# Altium PCB ThermoDisplay.PcbDoc
Units mm, origin at the board's own origin, x right, y up, seen from the top; angles counter-clockwise.
Board outline 60.95 x 36.71 mm, 2 copper layers (Top Layer, Bottom Layer); 35 components, 84 nets, 216 pads, 90 vias.
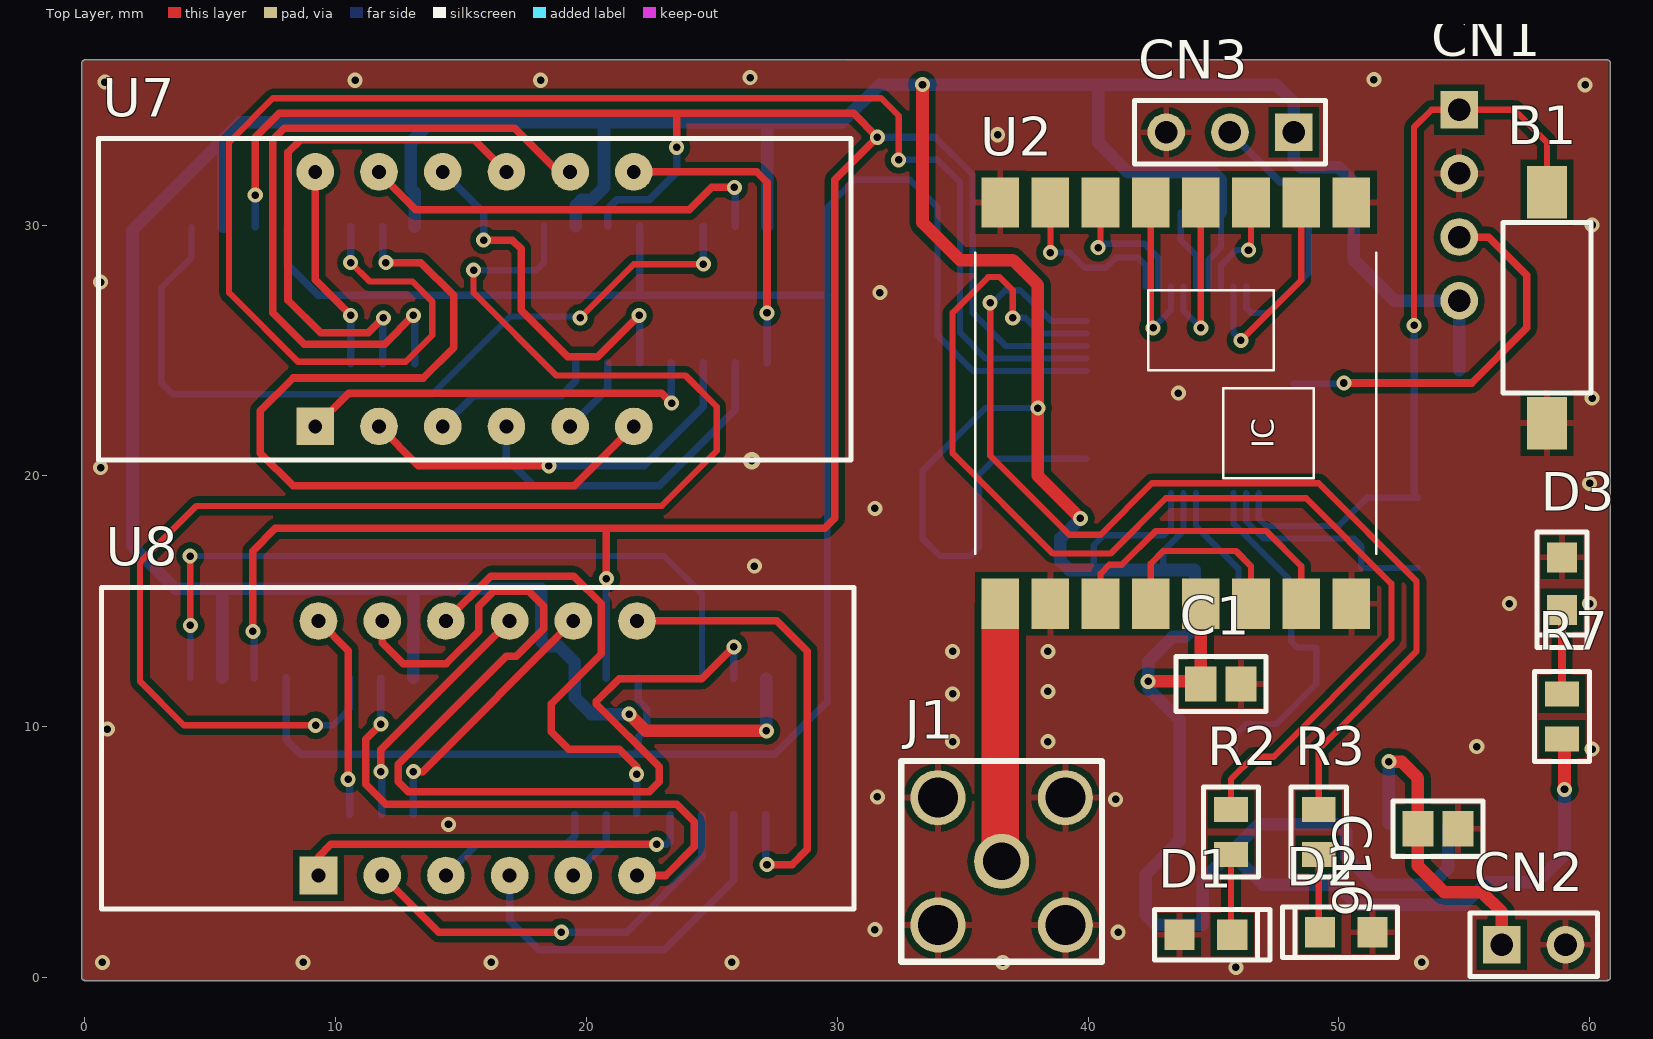
[diagram p0: Top Layer view]
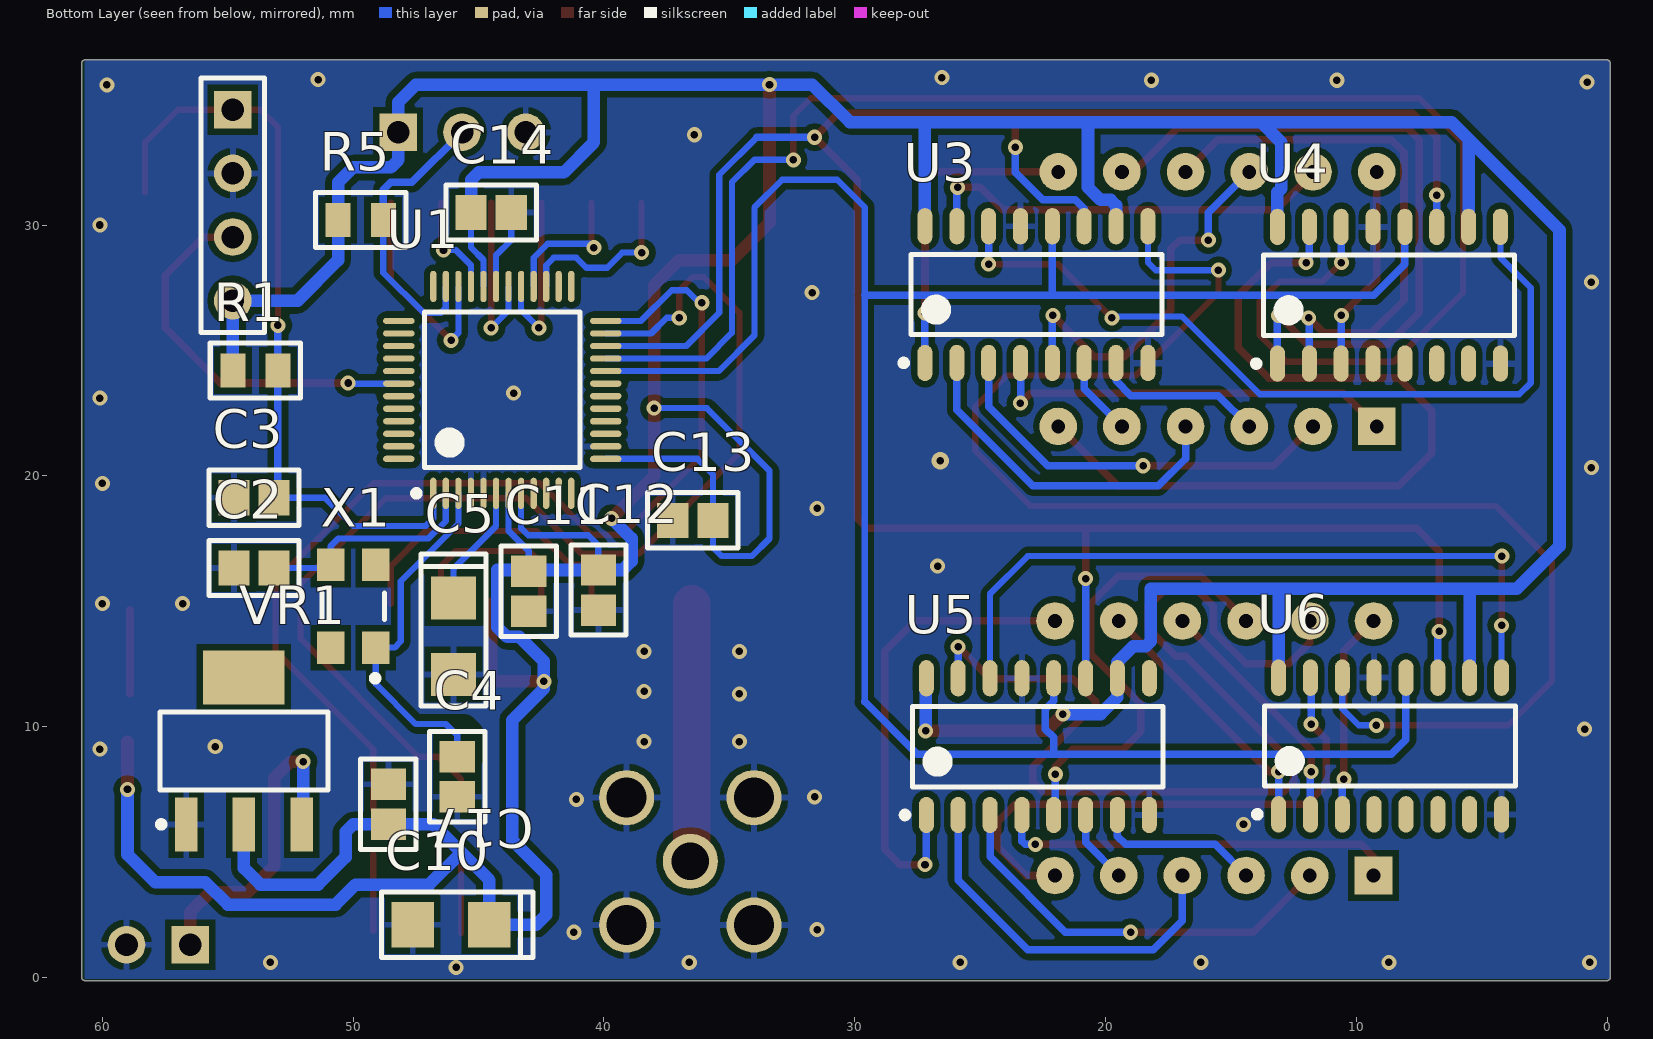
[diagram p1: Bottom Layer view, seen from below]

## Layer stack, top to bottom
Top Solder: solder mask 0.0102, Solder Resist, Dk 3.5
Top Layer: signal copper 0.0356
Dielectric 1: dielectric 0.32, FR-4, Dk 4.8
Bottom Layer: signal copper 0.0356
Bottom Solder: solder mask 0.0102, Solder Resist, Dk 3.5

## Board outline
-0.127,0 -0.127,36.38 cw(c0,36.38) -0.119,36.426 cw(c0.005,36.455) 0.005,36.582 60.7,36.582 cw(c60.7,36.455) 60.827,36.455 60.827,0 cw(c60.7,0) 60.7,-0.127 0,-0.127 cw(c0,0)

## Design rules (kind name [scope] priority, off if disabled: settings)
Clearance Clearance_GND_Polygons [All vs (InNamedPolygon('Top - GND polygon') OR InNamedPolygon('Bottom - GND polygon'))] p1: gap=0.25
Clearance [All] p2: gap=0.15
DiffPairsRouting [All] p1: maxlimit=1 minlimit=0.1 mostfreqgap=0.3 toplayer_minwidth=0.15 toplayer_maxwidth=0.381 toplayer_prefwidth=0.3 bottomlayer_minwidth=0.15 bottomlayer_maxwidth=0.381 bottomlayer_prefwidth=0.3 maxuncoupledlength=12.7
PolygonConnect PolygonConnect_GND_Vias [InNet('GND') AND IsVia] p1: connectstyle=Direct reliefconductorwidth=0.254 reliefentries=4 polygonreliefangle="90 Angle" airgapwidth=0.254
PolygonConnect [All] p2: connectstyle=Relief reliefconductorwidth=0.254 reliefentries=4 polygonreliefangle="90 Angle" airgapwidth=0.254
RoomDefinition ThermoDisplay [InComponentClass('ThermoDisplay')] p1: confinementstyle=ConfineOut formatcopy=TRUE lockcomponents=FALSE outline 131.704,-46.476 362.971,-46.476 362.971,-13.456 131.704,-13.456
RoutingVias [All] p1: holewidth=0.3 width=0.6 viastyle="Through Hole" minholewidth=0.3 minwidth=0.6 maxholewidth=0.3 maxwidth=0.6
SolderMaskExpansion [All] p1: expansion=0.102
Width [All] p1: maxlimit=1.5 minlimit=0.15 preferedwidth=0.3 bottomlayer_maxwidth=1 minimp=50.000000 maximp=50.000000 favimp=50.000000
28 further rules are at their usual default settings.

## Components (designator, comment, footprint, x,y, rotation, side; value= is the part's Value field where it differs from the comment)
B1 "" FSMSM 58.3,22.1 r90 top
C1 "0.1uF" Cap0805 45.3,11.7 r180 top
C2 "12pF" Cap0805 53.956,16.325 r180 bottom
C3 "0.1uF" Cap0805 53.956,19.125 r180 bottom
C4 "12pF" Cap0805 45.85,8 r90 bottom
C5 "1uF" TC_A 46,13.6 r270 bottom
C10 "1uF" TC_A 46.1,2.1 r0 bottom
C11 "0.1uF" Cap0805 43,15.4 r90 bottom
C12 "0.1uF" Cap0805 40.225,15.444 r90 bottom
C13 "0.1uF" Cap0805 36.456,18.225 r180 bottom
C14 "0.1uF" Cap0805 44.5,30.5 r0 bottom
C16 "0.1uF" Cap0805 53.956,5.925 r180 top
C17 "10uF" Cap0805 48.6,6.9 r270 bottom
CN1 "SWIM" "PLS-4 - bottom" 54.8,34.6 r0 top
CN2 "Name" PLS-2 56.5,1.3 r90 top
CN3 "Name" PLS-3 48.2,33.7 r270 top
D1 "Green" FYLS-0805 44.7,1.7 r180 top
D2 "Yellow" FYLS-0805 50.3,1.8 r0 top
D3 "Red" FYLS-0805 58.9,15.7 r90 top
J1 "SMA_RA" SMA_RA 36.556,4.625 r180 top
R1 "10K" Res0805 53.9,24.2 r0 bottom
R2 "510." Res0805 45.7,5.8 r90 top
R3 "510." Res0805 49.2,5.8 r90 top
R5 "4.7k" RES0805 49.7,30.2 r180 bottom
R7 "510." Res0805 58.9,10.4 r90 top
U1 "STM8S105C6T6" LQFP48_H 44.056,23.425 r90 bottom
U2 "RFM22B-S2" RFM22B-S2 43.5,22.9 r90 top
U3 "74HC595" SO-16_M 22.756,27.225 r90 bottom
U4 "74HC595" SO-16_M 8.7,27.2 r90 bottom
U5 "74HC595" SO-16_M 22.702,9.2 r90 bottom
U6 "74HC595" SO-16_M 8.656,9.225 r90 bottom
U7 "7seg4digLED" LD3361BS 9.19,21.969 r90 top
U8 "7seg4digLED" LD3361BS 9.317,4.062 r90 top
VR1 "LD1117" SOT223_M 54.356,9.025 r90 bottom
X1 "16MHz" KX-7 50,14.8 r90 bottom

## Footprints (in the part's own frame and the unit in brackets; to place one, negate y for a bottom-side part, rotate by r counter-clockwise, add the part's x,y. Pads: shape width x height; smd on the part's side, far side on the other; paste and mask are expansions set on the pad)
Cap0805 [mm]
  rect 1.25x1.4 smd: 1(-0.8,0) 2(0.8,0)
  silkscreen extent -1.8,-1.1 1.8,1.1
FSMSM [mm]
  rect 2.1x1.6 smd: 1(0,0) 2(9.2,0)
  silkscreen extent 1.2,-1.75 8,1.75, body extent -0.33,-1.77 9.63,1.73, height 4.4
FYLS-0805 [mm] "Diode"
  rect 1.2x1.2 smd: 1(-1.05,0) 2(1.05,0)
  silkscreen extent -2.55,-1 2.05,1
KX-7 [mm]
  rect 1.3x1.1 smd: 1(-1.65,-0.9) 2(1.65,0.9) 3(1.65,-0.9) 4(-1.65,0.9)
  silkscreen extent -3,-1.25 0.53,1.25
LD3361BS [mm] "segment four digit LED display 9.14mm"
  rect 1.5x1.5 hole 0.55: 1(0,0)
  round 1.5 hole 0.55: 2(0,-2.54) 3(0,-5.08) 4(0,-7.62) 5(0,-10.16) 6(0,-12.7) 7(10.15,-12.7) 8(10.15,-10.16) 9(10.15,-7.62) 10(10.15,-5.08) 11(10.15,-2.54) 12(10.15,0)
  silkscreen extent -1.34,-21.35 11.49,8.65
LQFP48_H [mm] "High dencity"
  oval 1.25x0.25 smd: 1(-4.125,2.75) 2(-4.125,2.25) 3(-4.125,1.75) 4(-4.125,1.25) 5(-4.125,0.75) 6(-4.125,0.25) 7(-4.125,-0.25) 8(-4.125,-0.75) 9(-4.125,-1.25) 10(-4.125,-1.75) 11(-4.125,-2.25) 12(-4.125,-2.75) 25(4.125,-2.75) 26(4.125,-2.25) 27(4.125,-1.75) 28(4.125,-1.25) 29(4.125,-0.75) 30(4.125,-0.25) 31(4.125,0.25) 32(4.125,0.75) 33(4.125,1.25) 34(4.125,1.75) 35(4.125,2.25) 36(4.125,2.75)
  oval 0.25x1.25 smd: 13(-2.75,-4.125) 14(-2.25,-4.125) 15(-1.75,-4.125) 16(-1.25,-4.125) 17(-0.75,-4.125) 18(-0.25,-4.125) 19(0.25,-4.125) 20(0.75,-4.125) 21(1.25,-4.125) 22(1.75,-4.125) 23(2.25,-4.125) 24(2.75,-4.125) 37(2.75,4.125) 38(2.25,4.125) 39(1.75,4.125) 40(1.25,4.125) 41(0.75,4.125) 42(0.25,4.125) 43(-0.25,4.125) 44(-0.75,4.125) 45(-1.25,4.125) 46(-1.75,4.125) 47(-2.25,4.125) 48(-2.75,4.125)
  silkscreen extent -4.25,-3.1 3.1,3.55, body extent -3.5,-3.5 3.5,3.5, height 1.6
PLS-2 [mm]
  rect 1.5x1.5 / inner rect 1.6x1.5 / far side rect 1.5x1.5 hole 0.9: 1(0,0)
  round 1.5 / inner oval 1.6x1.5 / far side round 1.5 hole 0.9: 2(0,-2.54)
  silkscreen extent -1.27,-3.81 1.27,1.27
PLS-3 [mm]
  rect 1.5x1.5 / inner rect 1.6x1.5 / far side rect 1.5x1.5 hole 0.9: 1(0,0)
  round 1.5 / inner oval 1.6x1.5 / far side round 1.5 hole 0.9: 2(0,-2.54) 3(0,-5.08)
  silkscreen extent -1.27,-6.35 1.27,1.27
"PLS-4 - bottom" [mm]
  rect 1.5x1.5 / inner rect 1.6x1.5 / far side rect 1.5x1.5 hole 0.9: 1(0,0)
  round 1.5 / inner oval 1.6x1.5 / far side round 1.5 hole 0.9: 2(0,-2.54) 3(0,-5.08) 4(0,-7.62)
Res0805 [mm]
  rect 1x1.35 smd: 1(-0.9,0) 2(0.9,0)
  silkscreen extent -1.8,-1.1 1.8,1.1
RES0805 [mm]
  rect 1x1.35 smd: 1(-0.9,0) 2(0.9,0)
  silkscreen extent -1.8,-1.1 1.8,1.1
RFM22B-S2 [mm]
  rect 2x1.5 smd: 1(-8,-1) 2(-8,5) 2(8,-7) 2(8,7) 3(-8,-3) 4(-8,-5) 5(-8,-7) 6(8,-5) 7(8,-3) 8(8,-1) 9(8,1) 10(8,3) 11(8,5) 12(-8,1) 13(-8,3) 14(-8,7)
  silkscreen extent -6,-8 6,8
SMA_RA [mm] "SMA RIGHT ANGEL PCB"
  round 2.2 hole 1.5: 1(0,0)
  round 2.2 hole 1.6: 2(-2.54,2.54) 2(-2.54,-2.54) 2(2.54,2.54) 2(2.54,-2.54)
  silkscreen extent -4,-4 4,4, body extent -3.12,-3.13 3.22,11.68, height 9.67
SO-16_M [mm] "SOP, 16-Leads, Body 9,90x3,90mm, Pitch 1,27mm, IPC Medium Density"
  oval 1.45x0.6 smd: 1(-2.725,4.445) 2(-2.725,3.175) 3(-2.725,1.905) 4(-2.725,0.635) 5(-2.725,-0.635) 6(-2.725,-1.905) 7(-2.725,-3.175) 8(-2.725,-4.445) 9(2.725,-4.445) 10(2.725,-3.175) 11(2.725,-1.905) 12(2.725,-0.635) 13(2.725,0.635) 14(2.725,1.905) 15(2.725,3.175) 16(2.725,4.445)
  silkscreen extent -2.85,-5 1.6,5.42, body extent -3.08,-5.04 3.08,5.04, height 2
SOT223_M [mm] "SOT223, 4-Leads, Body 6,50x7,00mm (avg), Pitch 2,30mm, IPC Medium Density"
  rect 2.15x0.9 smd: 1(-2.925,-2.3) 2(-2.925,2.3) 3(-2.925,0)
  rect 2.15x3.25 smd: 4(2.925,0)
  silkscreen extent -3.05,-3.35 1.55,3.43, body extent -1.85,-3.35 1.85,3.35, height 1.8
TC_A [mm]
  rect 1.7x1.8 smd: 1(-1.525,0) 2(1.525,0)
  silkscreen extent -3.27,-1.3 2.78,1.3

## Part data
B1: library part FSM14JRT, "Button"
C1 C3 C11 C12 C13 C14 C16: library part "Cap 0805 0.1uF", "Capacitor"
C2 C4: library part "Cap 0805 12pF", "Capacitor"
C5 C10: library part "TCap TC_A 1uF", "Capacitor polarity"
C17: library part "Cap 0805 10uF", "Capacitor"
CN1: "PLS-4"
CN2: library part PLS-2, "PLS-2"
CN3: library part PLS-3, "PLS-3"
D1: library part FYLS-0805UGC, "LED"
D2: library part FYLS-0805UYC, "LED"
D3: library part FYLS-0805URC, "LED"
J1: library part "SMA RIGHT ANGEL PCB"
R1: library part "Res 0805 10K", "Resistor"
R2 R3 R7: library part "Res 0805 510", "Resistor"
R5: library part Resistor, "Resistor"
U1: "Microcontroller"
U2: "Transmitter"
U3 U4 U5 U6: "Shift Register"
U7 U8: library part 7SEG4LED, "7 segment 4-digit LED"
VR1: "Voltage Regulator"
X1: library part "KX-7T 16.0 MHz", "XTAL"

## Via types
v1: diameter 0.6, hole 0.3, Top Layer to Bottom Layer, 88 vias
v2: diameter 0.6, hole 0.3, Top Layer to Bottom Layer, tented both sides, 1 vias
v3: diameter 0.7, hole 0.3, Top Layer to Bottom Layer, 1 vias

## Nets (pads, with @x,y where several pads share a name; then routed paths per layer and width w, separated by ;. In a path a pad name is that pad's centre, name@x,y a point inside that pad or via, vN(x,y) a via of type N, cw(c..) or ccw(c..) an arc to the next point about the centre after c; other vN are vias at no path point)
4LED1_P1: U3.4 U7.1 | length 16.5
  Top Layer w0.3: U7.1 10.521,23.3 23,23.3 v1(23.4,22.9)
  Bottom Layer w0.3: U3.4 23.391,22.909 v1(23.4,22.9)
4LED1_P2: U3.3 U7.2 | length 16.3
  Top Layer w0.3: U7.2 13.299,20.4 v1(18.5,20.4)
  Bottom Layer w0.3: v1(18.5,20.4) 22.3,20.4 24.661,22.761 U3.3
4LED1_P3: U3.7 U7.3 | length 6.8
  Bottom Layer w0.3: U7.3 15.501,23.2 19,23.2 19.581,23.781 U3.7
4LED1_P4: U3.2 U7.4 | length 14
  Bottom Layer w0.3: U7.4 16.81,20.69 17.9,19.6 22.9,19.6 25.931,22.631 U3.2
4LED1_P5: U3.6 U7.5 | length 3.2
  Bottom Layer w0.3: U7.5 20.851,23.47 U3.6
4LED1_P6: U4.15 U7.6 | length 33.5
  Top Layer w0.3: v1(12,28.5) 13.4,28.5 14.7,27.2 14.7,25.1 13.5,23.9 8.3,23.9 7,22.6 7,20.9 8.3,19.6 19.521,19.6 U7.6
  Bottom Layer w0.3: v1@11.875,28.575 U4.15
4LED1_P7: U3.1 U7.7 | length 12.7
  Top Layer w0.3: U7.7 26.781,32.119 27.2,31.7 v1(27.2,26.5)
  Bottom Layer w0.3: U3.1 v1@27.201,26.499
4LED1_P8: U4.1 U7.8 | length 28.1
  Top Layer w0.3: v1(13.1,26.4) 11.95,25.25 8.75,25.25 7.5,26.5 7.5,33.4 7.95,33.85 17.15,33.85 18.881,32.119 U7.8
  Bottom Layer w0.3: U4.1 v1@13.145,26.355
4LED1_P9: U4.2 U7.9 | length 21.7
  Top Layer w0.3: v1(11.9,26.3) 11.3,25.7 9.4,25.7 8.1,27 8.1,32.9 8.6,33.4 15.529,33.4 U7.9
  Bottom Layer w0.3: U4.2 v1@11.875,26.275
4LED1_P10: U3.5 U7.10 | length 15.5
  Top Layer w0.3: v1(15.9,29.4) 17.05,29.4 17.4,29.05 17.4,26.6 19.25,24.75 20.45,24.75 v1(22.1,26.4)
  Bottom Layer w0.3: U7.10 15.9,30.489 v1(15.9,29.4) ; U3.5 v1@22.121,26.379
4LED1_P11: U3.15 U7.11 | length 16.7
  Top Layer w0.3: U7.11 11.73,32.07 13.2,30.6 24.1,30.6 25,31.5 v1(25.9,31.5)
  Bottom Layer w0.3: U3.15 v1@25.931,31.469
4LED1_P12: U4.3 U7.12 | length 8.2
  Top Layer w0.3: U7.12 9.19,27.81 v1(10.6,26.4)
  Bottom Layer w0.3: U4.3 v1@10.605,26.395
4LED2_P1: U5.4 U8.1 | length 16.1
  Top Layer w0.3: U8.1 9.317,4.817 9.8,5.3 v1(22.8,5.3)
  Bottom Layer w0.3: v1(22.8,5.3) 23.2,5.3 23.337,5.437 U5.4
4LED2_P2: U5.3 U8.2 | length 16.6
  Top Layer w0.3: U8.2 14.119,1.8 v1(19,1.8)
  Bottom Layer w0.3: v1(19,1.8) 21.6,1.8 24.607,4.807 U5.3
4LED2_P3: U5.7 U8.3 | length 6.6
  Bottom Layer w0.3: U8.3 15.635,5.3 19.2,5.3 19.527,5.627 U5.7
4LED2_P4: U5.2 U8.4 | length 15
  Bottom Layer w0.3: U8.4 16.937,2.263 18.1,1.1 23.1,1.1 25.877,3.877 U5.2
4LED2_P5: U5.6 U8.5 | length 3
  Bottom Layer w0.3: U8.5 20.797,5.382 U5.6
4LED2_P6: U6.15 U8.6 | length 21.9
  Top Layer w0.3: v1(11.8,10.1) 11.2,9.5 11.2,7.7 12,6.9 23.6,6.9 24.3,6.2 24.3,5.2 23.162,4.062 U8.6
  Bottom Layer w0.3: v1(11.8,10.1) U6.15@11.8,11.919
4LED2_P7: U5.1 U8.7 | length 19
  Top Layer w0.3: U8.7 27.588,14.212 28.8,13 28.8,5.1 28.2,4.5 v1(27.2,4.5)
  Bottom Layer w0.3: v1@27.147,4.553 U5.1
4LED2_P8: U6.1 U8.8 | length 10.6
  Top Layer w0.3: v1(13.1,8.2) 13.465,8.2 U8.8
  Bottom Layer w0.3: U6.1 v1(13.1,8.2)
4LED2_P9: U6.2 U8.9 | length 9.8
  Top Layer w0.3: v1(11.8,8.2) 11.8,9.075 U8.9
  Bottom Layer w0.3: U6.2 v1@11.831,8.169
4LED2_P10: U5.5 U8.10 | length 19.3
  Top Layer w0.3: U8.10@14.397,14.297 U8.10 16.185,16 19.5,16 20.6,14.9 20.6,12.9 18.6,10.9 18.6,9.8 19.3,9.1 21.3,9.1 22,8.4 v1(22,8.1)
  Bottom Layer w0.3: U5.5@22,6.542 v1(22,8.1)
4LED2_P11: U5.15 U8.11 | length 41.9
  Top Layer w0.3: U8.11 11.857,13.343 12.7,12.5 14.4,12.5 15.7,13.8 15.7,14.8 16.3,15.4 17.7,15.4 18.3,14.8 18.3,13.9 17.2,12.8 16.8,12.8 12.5,8.5 12.5,7.8 12.9,7.4 22.5,7.4 22.9,7.8 22.9,8.4 20.4,10.9 20.4,11 21.3,11.9 24.6,11.9 v1(25.877,13.177)
  Bottom Layer w0.3: U5.15 v1(25.877,13.177)
4LED2_P12: U6.3 U8.12 | length 8.2
  Top Layer w0.3: U8.12 10.5,13.029 v1(10.5,7.9)
  Bottom Layer w0.3: v1(10.5,7.9) 10.561,7.839 U6.3
+3.3V: C1.2 C10.1 C11.2 C12.2 C13.2 C14.2 C17.2 CN1.4 CN3.1 R1.2 R5.1 R7.1 U1.7 U1.8 U1.13 U1.32 U2.1 U3.10 U3.16 U4.10 U4.16 U5.10 U5.16 U6.10 U6.16 VR1.3 | length 261.7
  Top Layer w0.5: v1(21.7,10.5) 22.373,9.827 v1(27.173,9.827) ; v1(33.4,35.6) 33.4,30.1 34.9,28.6 37,28.6 38,27.6 v1(38,22.7) 38,20 v1(39.7,18.3) ; v1(42.4,11.8) 44.5,11.8 U2.1 ; v1(59,7.5) R7.1@59,9.4
  Bottom Layer w0.25: v1(38,22.7) 35.9,22.7 33.4,20.2 33.4,17.5 34.1,16.8 35.3,16.8 35.656,17.156 C13.2 35.656,20.056 36.275,20.675 U1.13 ; C12.2 40.225,17.225 40.625,17.625 43.025,17.625 43.306,17.906 U1.8 ; C11.2 43,17 43.8,17.8 43.806,17.8 U1.7 ; U1.32 44.806,28.606 45.3,29.1 C14.2
  Bottom Layer w0.5: U6.10 5.481,15.481 ; U4.10 5.525,33.425 ; U6.16 13.101,15.499 ; U4.16 13.145,31.3 13,31.445 13,33.3 13.8,34.1 ; U3.10 19.581,30.781 19.8,31 20.2,31 20.7,31.5 20.7,34.1 ; v1(21.7,10.5) 20.2,10.5 19.527,11.173 U5.10 19.527,12.573 18.9,13.2 18.4,13.2 18.2,13.4 18.2,15.5 3.6,15.5 1.9,17.2 1.9,29.8 5.525,33.425 ; v1(27.173,9.827) U5.16@27.173,11.899 ; U3.16 27.201,34.099 ; v1(39.7,18.3) 38.9,17.5 38.9,16.6 39.256,16.244 C12.2 44.25,16.244 44.25,13.959 43.866,13.575 43.375,13.575 42.4,12.6 v1(42.4,11.8) 42.4,11.512 43.656,10.256 43.656,5.456 42.3,4.1 42.3,2.5 42.7,2.1 C10.1 44.575,3.875 45.688,4.987 ; C14.2 45.3,31.8 45,32.1 41.6,32.1 40.4,33.3 40.4,35.6 ; VR1.3 54.356,4.356 53.7,3.7 51.4,3.7 50.3,4.8 50.3,5.8 50,6.1 C17.2 46.8,6.1 45.688,4.987 ; R1.2 CN1.4 52.22,26.98 50.6,28.6 R5.1 50.6,31.7 50,32.3 48.5,32.3 48.2,32.6 CN3.1 48.2,34.9 47.5,35.6 40.4,35.6 ; v1(59,7.5) 59,4.9 57.9,3.8 55.9,3.8 55,2.9 50.7,2.9 49.9,3.7 46.975,3.7 45.688,4.987 ; 5.525,33.425 6.2,34.1 13.8,34.1 ; 13.8,34.1 20.7,34.1 ; 20.7,34.1 30.2,34.1 31.7,35.6 v1(33.4,35.6) 40.4,35.6
GND: B1.1 C1.1 C2.1 C3.1 C4.1 C5.2 C10.2 C11.1 C12.1 C13.1 C14.1 C16.1 C17.1 CN1.2 CN2.2 CN3.3 D1.2 D2.2 D3.2 J1.2 U1.4 U1.5 U1.14 U1.31 U2.2 U2.5 U3.8 U3.13 U4.8 U4.13 U5.8 U5.13 U6.8 U6.13 VR1.2 | length 3.2
  Bottom Layer w0.25: C14.1 43.7,29.4 44.306,28.794 U1.31
  other v1: 45.9,0.4 0.7,0.6 8.7,0.6 16.2,0.6 25.8,0.6 36.6,0.6 53.3,0.6 41.2,1.8 31.5,1.9 14.5,6.1 41.1,7.1 31.6,7.2 60.1,9.1 55.5,9.2 34.6,9.4 38.4,9.4 0.9,9.9 34.6,11.3 38.4,11.4 34.6,13 38.4,13 56.8,14.9 60,14.9 26.7,16.4 31.5,18.7 60,19.7 0.627,20.327 60.1,23.1 43.6,23.3 31.7,27.3 0.627,27.727 60.1,30 36.4,33.6 59.826,35.584 10.773,35.773 18.173,35.773 51.4,35.8 26.527,35.873
  other v2: 0.8,35.7
  other v3: 26.6,20.6
LED1: D1.1 R2.1 | length 3.2
  Top Layer w0.25: D1.1@45.7,1.75 R2.1
LED2: D2.1 R3.1 | length 3.1
  Top Layer w0.25: D2.1@49.2,1.85 R3.1
MAX10V: C16.2 CN2.1 VR1.1 | length 12.8
  Top Layer w0.5: v1(52,8.6) 52.5,8.6 53.156,7.944 C16.2 53.156,4.444 54.2,3.4 55.7,3.4 56.5,2.6 CN2.1
  Bottom Layer w0.5: VR1.1@52,6.156 v1(52,8.6)
NetB1_2: B1.2 C3.2 CN1.1 R1.1 U1.1 | length 30.7
  Top Layer w0.25: v1(53,26) 53,33.9 53.7,34.6 CN1.1 57,34.6 58.3,33.3 B1.2
  Bottom Layer w0.25: U1.1 46.806,18.294 47.1,18 50,18 51.125,19.125 C3.2
  Bottom Layer w0.3: C3.2@53,19.281 R1.1 v1(53,26)
NetC2_2: C2.2 U1.2 X1.2 | length 9.2
  Bottom Layer w0.25: U1.2 46.306,18.194 47,17.5 50.6,17.5 50.9,17.2 X1.2 50.9,16.325 C2.2
NetC4_2: C4.2 U1.3 X1.1 | length 14.4
  Bottom Layer w0.25: U1.3 45.806,18.094 48.1,15.8 48.1,13.4 48.35,13.15 X1.1 49.1,11.7 47.5,10.1 46.3,10.1 45.85,9.65 C4.2
NetC5_1: C5.1 U1.6 | length 4.9
  Bottom Layer w0.25: U1.6 44.306,17.994 46,16.3 C5.1
NetD3_1: D3.1 R7.2 | length 3.3
  Top Layer w0.3: R7.2 D3.1
NetJ1_1: J1.1 U2.14 | length 10.3
  Top Layer w1: J1.1@36.5,4.681 J1.1
  Top Layer w1.5: J1.1@36.5,4.681 U2.14
NETLABEL31: U4.4
NETLABEL32: U4.5
NETLABEL33: U4.6
NETLABEL34: U4.7
NETLABEL35: U6.4
NETLABEL36: U6.5
NETLABEL37: U6.6
NETLABEL38: U6.7
NetU2_3: U2.3 U2.12 | length 7.6
  Top Layer w0.25: U2.12 42.5,16.5 43,17 45.9,17 46.5,16.4 U2.3
NetU2_4: U2.4 U2.13 | length 12
  Top Layer w0.25: U2.13 40.5,16.1 40.85,16.45 41.35,16.45 42.7,17.8 47.1,17.8 48.5,16.4 U2.4
NetU3_9: U3.9 U6.14 | length 58.8
  Top Layer w0.25: v1(9.2,10.05) 3.95,10.05 2.2,11.8 2.2,16.55 4.45,18.8 23,18.8 25.2,21 25.2,22.75 23.95,24 18.8,24 15.5,27.3 v1(15.5,28.2)
  Bottom Layer w0.25: v1(9.2,10.05) 9.9,10.05 10.561,10.711 U6.14 ; v1(15.5,28.2) 18,28.2 18.311,28.511 U3.9
NetU3_14: U3.14 U4.9 | length 32.4
  Top Layer w0.25: v1(19.75,26.3) 21.889,28.439 v1(24.661,28.439)
  Bottom Layer w0.25: U4.9 4.255,28.705 3.05,27.5 3.05,23.7 3.5,23.25 13.85,23.25 16.95,26.35 19.6,26.35 19.75,26.2 v1(19.75,26.3)
  Bottom Layer w0.3: v1(24.661,28.439) U3.14
NetU5_14: U5.14 U6.9 | length 29.2
  Top Layer w0.25: v1@4.2,14.05 v1(4.2,16.8)
  Bottom Layer w0.25: v1(4.2,16.8) 23.1,16.8 24.607,15.293 U5.14 ; U6.9 v1(4.211,14.039)
NIRQ: U1.28 U2.10 | length 5.7
  Top Layer w0.25: v1(40.4,29.1) 40.5,29.2 U2.10
  Bottom Layer w0.25: v1(40.4,29.1) 40.55,29.25 42.25,29.25 42.806,28.694 U1.28
NSEL: U1.29 U2.9 | length 7
  Top Layer w0.25: U2.9 42.5,26 v1(42.6,25.9)
  Bottom Layer w0.25: v1(42.6,25.9) 43.306,26.606 U1.29
PA3: U1.9
PA4: U1.10
PA5: U1.11
PA6: U1.12
PB3: U1.19
PB4: U1.18
PB5: U1.17
PB6: U1.16
PB7: U1.15
PC1: U1.26
PD0: U1.41
PD2: U1.43
PD3: U1.44
PD4: U1.45
PD7: U1.48
PE0: U1.40
PE1: U1.39
PE2: U1.38
PE3: U1.37
PE5: U1.25
PE6: R3.2 U1.24 | length 42.3
  Top Layer w0.25: v1(36.1,26.9) 36.1,20.8 39.25,17.65 40.5,17.65 42.55,19.7 49.2,19.7 53.1,15.8 53.1,13 49.2,9.1 R3.2
  Bottom Layer w0.25: v1(36.1,26.9) 36.1,26.8 36.7,27.4 37.3,27.4 38.525,26.175 U1.24
PE7: R2.2 U1.23 | length 46.7
  Top Layer w0.25: v1(37,26.3) 37,27.4 36.475,27.925 36.025,27.925 34.6,26.5 34.6,20.9 38.6,16.9 40.9,16.9 43.1,19.1 48.7,19.1 52.1,15.7 52.1,13.5 47.4,8.8 46.6,8.8 45.7,7.9 R2.2
  Bottom Layer w0.25: v1(37,26.3) 37.5,26.3 38.125,25.675 U1.23
PG0: CN3.2 R5.2 U1.35 | length 11.5
  Bottom Layer w0.25: U1.35 46.306,26.694 46.506,26.494 47.194,26.494 48.8,28.1 R5.2
  Bottom Layer w0.3: CN3.2 47.66,31.7 48.5,31.7 48.8,31.4 R5.2
PG1: U1.36
SCLK: U1.30 U2.8 | length 6.9
  Top Layer w0.25: v1(44.5,25.9) U2.8
  Bottom Layer w0.25: U1.30 43.806,26.594 v1(44.5,25.9)
SDI: U1.33 U2.7 | length 4
  Top Layer w0.25: v1@46.5,29.1 U2.7
  Bottom Layer w0.25: U1.33 45.306,28.406 45.9,29 v1(46.4,29)
SDN: U1.27 U2.11 | length 7.2
  Top Layer w0.25: v1(38.5,28.9) U2.11
  Bottom Layer w0.25: v1(38.5,28.9) 39.275,28.9 39.875,28.3 40.7,28.3 41.1,28.7 42.005,28.7 42.306,28.399 U1.27
SDO: U1.34 U2.6 | length 8.8
  Top Layer w0.25: v1(46.1,25.4) 48.5,27.8 U2.6
  Bottom Layer w0.25: U1.34 45.806,25.694 v1(46.1,25.4)
SHCLK: U1.22 U3.11 U4.11 U5.11 U6.11 | length 101.2
  Top Layer w0.3: v1(6.7,13.8) 6.7,17 7.6,17.9 29.5,17.9 29.9,18.3 29.9,31.8 v1(31.6,33.5) 30.65,34.45 23.6,34.45 ; v1(6.795,31.195) 6.795,33.495 7.75,34.45 23.6,34.45 ; v1(20.797,15.9) 20.797,17.9 ; v1(23.6,33.1) 23.6,34.45
  Bottom Layer w0.25: 33.9,33.5 35.4,32 35.4,26.5 36.725,25.175 U1.22
  Bottom Layer w0.3: U6.11 v1@6.751,13.749 ; U4.11 v1(6.795,31.195) ; U5.11 v1(20.797,15.9) ; U3.11 20.851,30.651 21.2,31 22.5,31 23.6,32.1 v1(23.6,33.1) ; v1(31.6,33.5) 33.9,33.5
SHDTA: U1.21 U4.14 | length 66.1
  Top Layer w0.25: v1(10.6,28.5) 11.35,27.75 13.05,27.75 13.85,26.95 13.85,25.6 12.8,24.55 8.5,24.55 5.75,27.3 5.75,33.3 7.5,35.05 31.75,35.05 32.45,34.35 v1(32.45,32.6)
  Bottom Layer w0.25: v1(32.45,32.6) 34,32.6 34.9,31.7 34.9,25.7 35.925,24.675 U1.21
  Bottom Layer w0.3: v1@10.605,28.505 U4.14
SHLTC: U1.20 U3.12 U4.12 U5.12 U6.12 | length 91.4
  Bottom Layer w0.25: 29.6,11 29.6,30.7 30.7,31.8 32.9,31.8 34,30.7 34,25.6 35.425,24.175 U1.20
  Bottom Layer w0.3: U6.12 8.021,9.479 8.6,8.9 27.5,8.9 29.6,11 ; U4.12 8.065,28.435 9.3,27.2 29.6,27.2 ; 22.067,8.9 22.067,9.567 22.4,9.9 22.4,10.7 22.067,11.033 U5.12 ; 22.121,27.2 U3.12
SWIM: CN1.3 U1.42 | length 15.7
  Top Layer w0.3: v1(50.2,23.7) 55.3,23.7 57.5,25.9 57.5,28 55.98,29.52 CN1.3
  Bottom Layer w0.25: U1.42 50.175,23.675 v1(50.2,23.7)
UART_RX: U1.47
UART_TX: U1.46
pads on no net: U5.9 VR1.4 X1.3 X1.4

## Polygon pours and split planes (outlines as drawn)
GND on Top Layer "Top - GND polygon" (solid, remove dead copper, pour order 4): 60.7,36.593 60.749,36.544 60.749,-0.118 0.02,-0.118 0,-0.138 -0.093,-0.045 -0.093,36.553
GND on Bottom Layer "Bottom - GND polygon" (solid, remove dead copper, pour order 6): 60.7,36.593 60.7,0 60.798,-0.098 60.749,-0.049 -0.118,-0.049 -0.118,36.46 0.005,36.582

## Other copper
Bottom Layer:
  pour cut-out: 42.52,29.52 44.918,29.52 44.918,29.258 44.424,28.764 44.424,28.513 43.192,28.513 43.188,28.509

## Silkscreen, mask and mechanical layers (free items; w line width, h text height)
Mechanical 1:
  lines w0.254: 0,36.38 0,0 60.7,0 60.7,36.455 0.005,36.455

## Text inside footprints (layer, text, board x,y; h text height)
U2: Top Overlay "IC" at 47.7,21.1 h1.5 r90